# EAGLE board Layout (EAGLE 6.5.0)
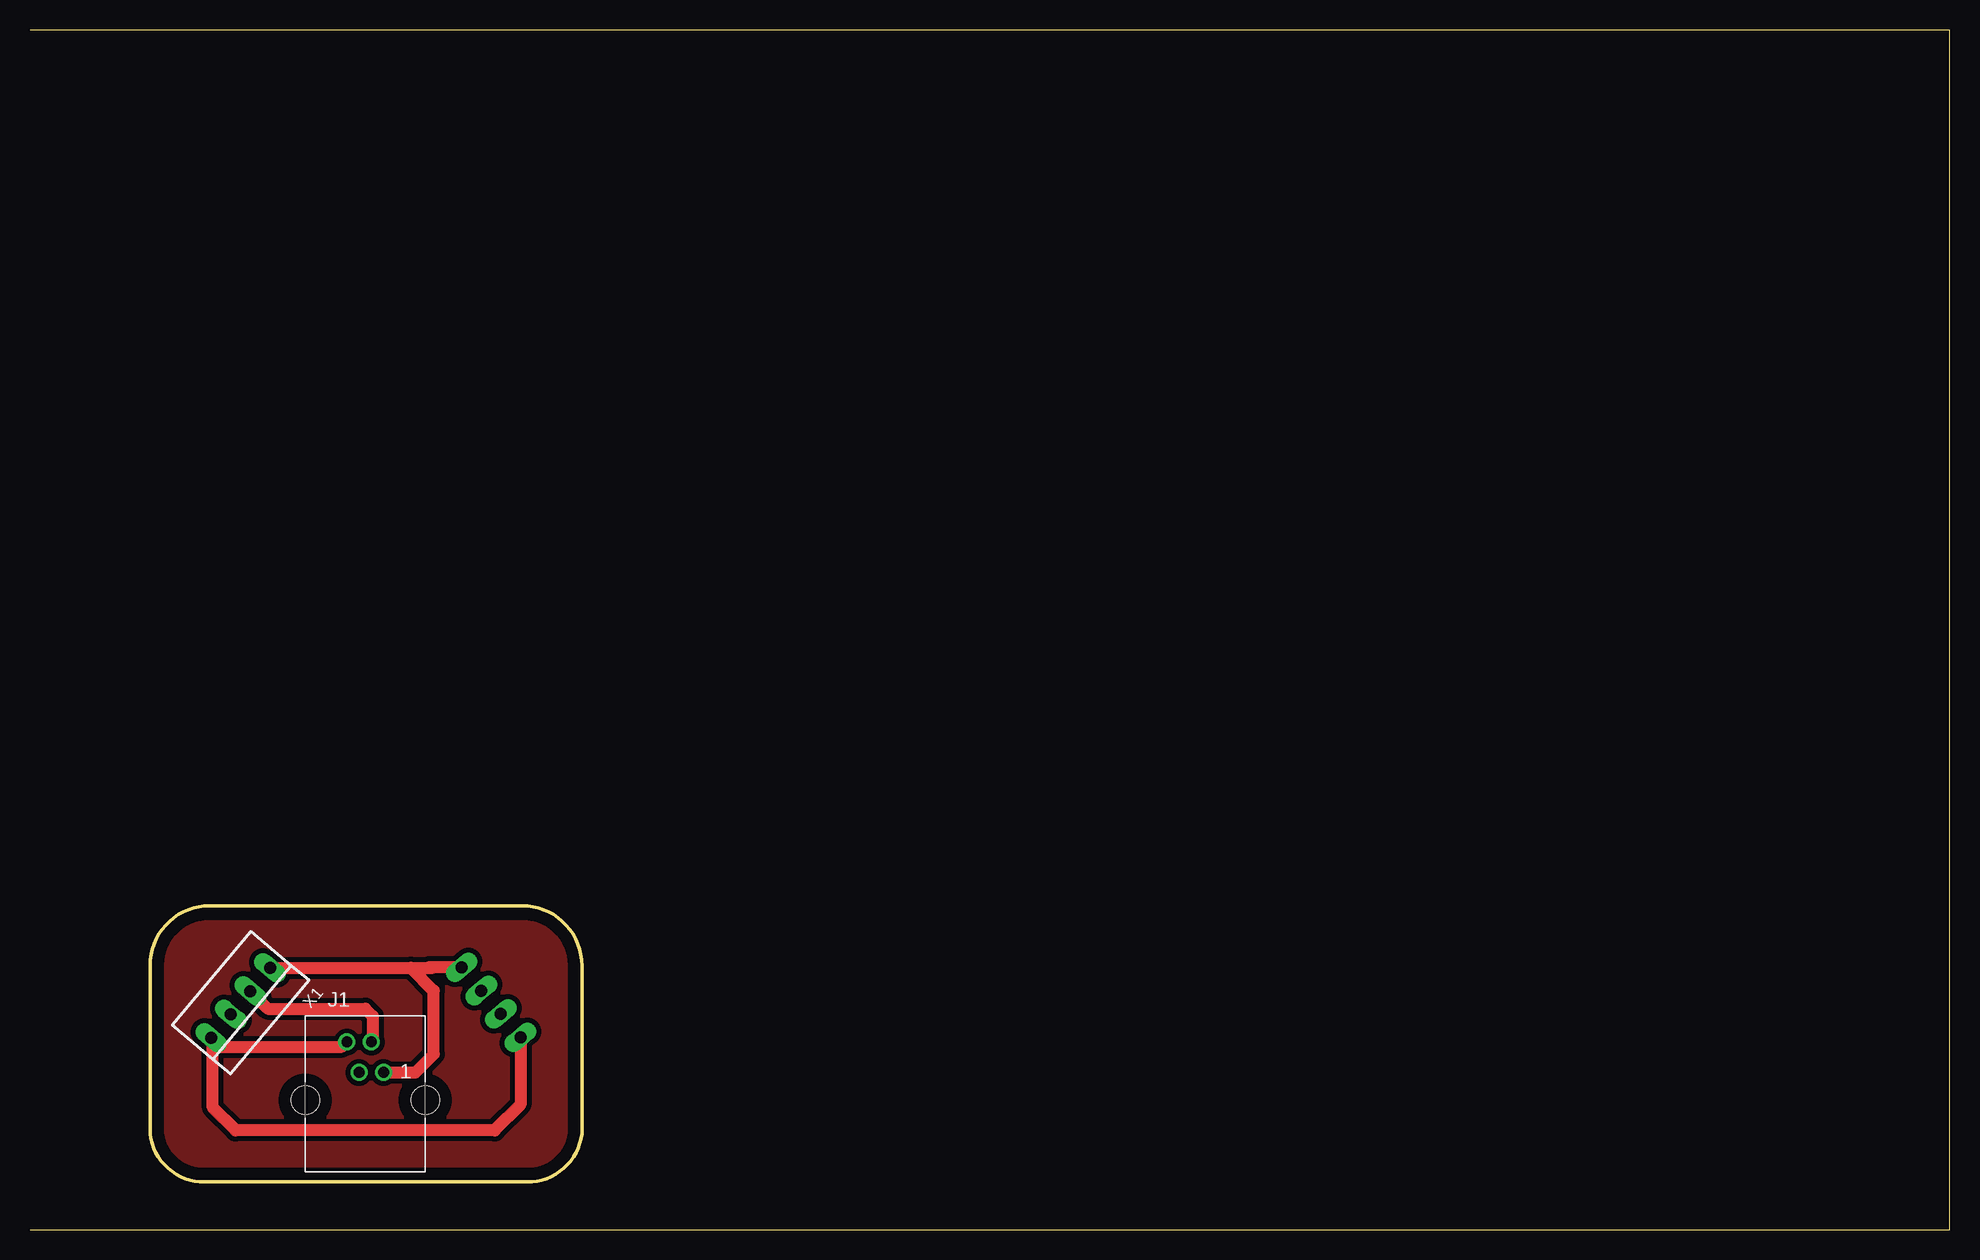
[diagram p0: board, top side]
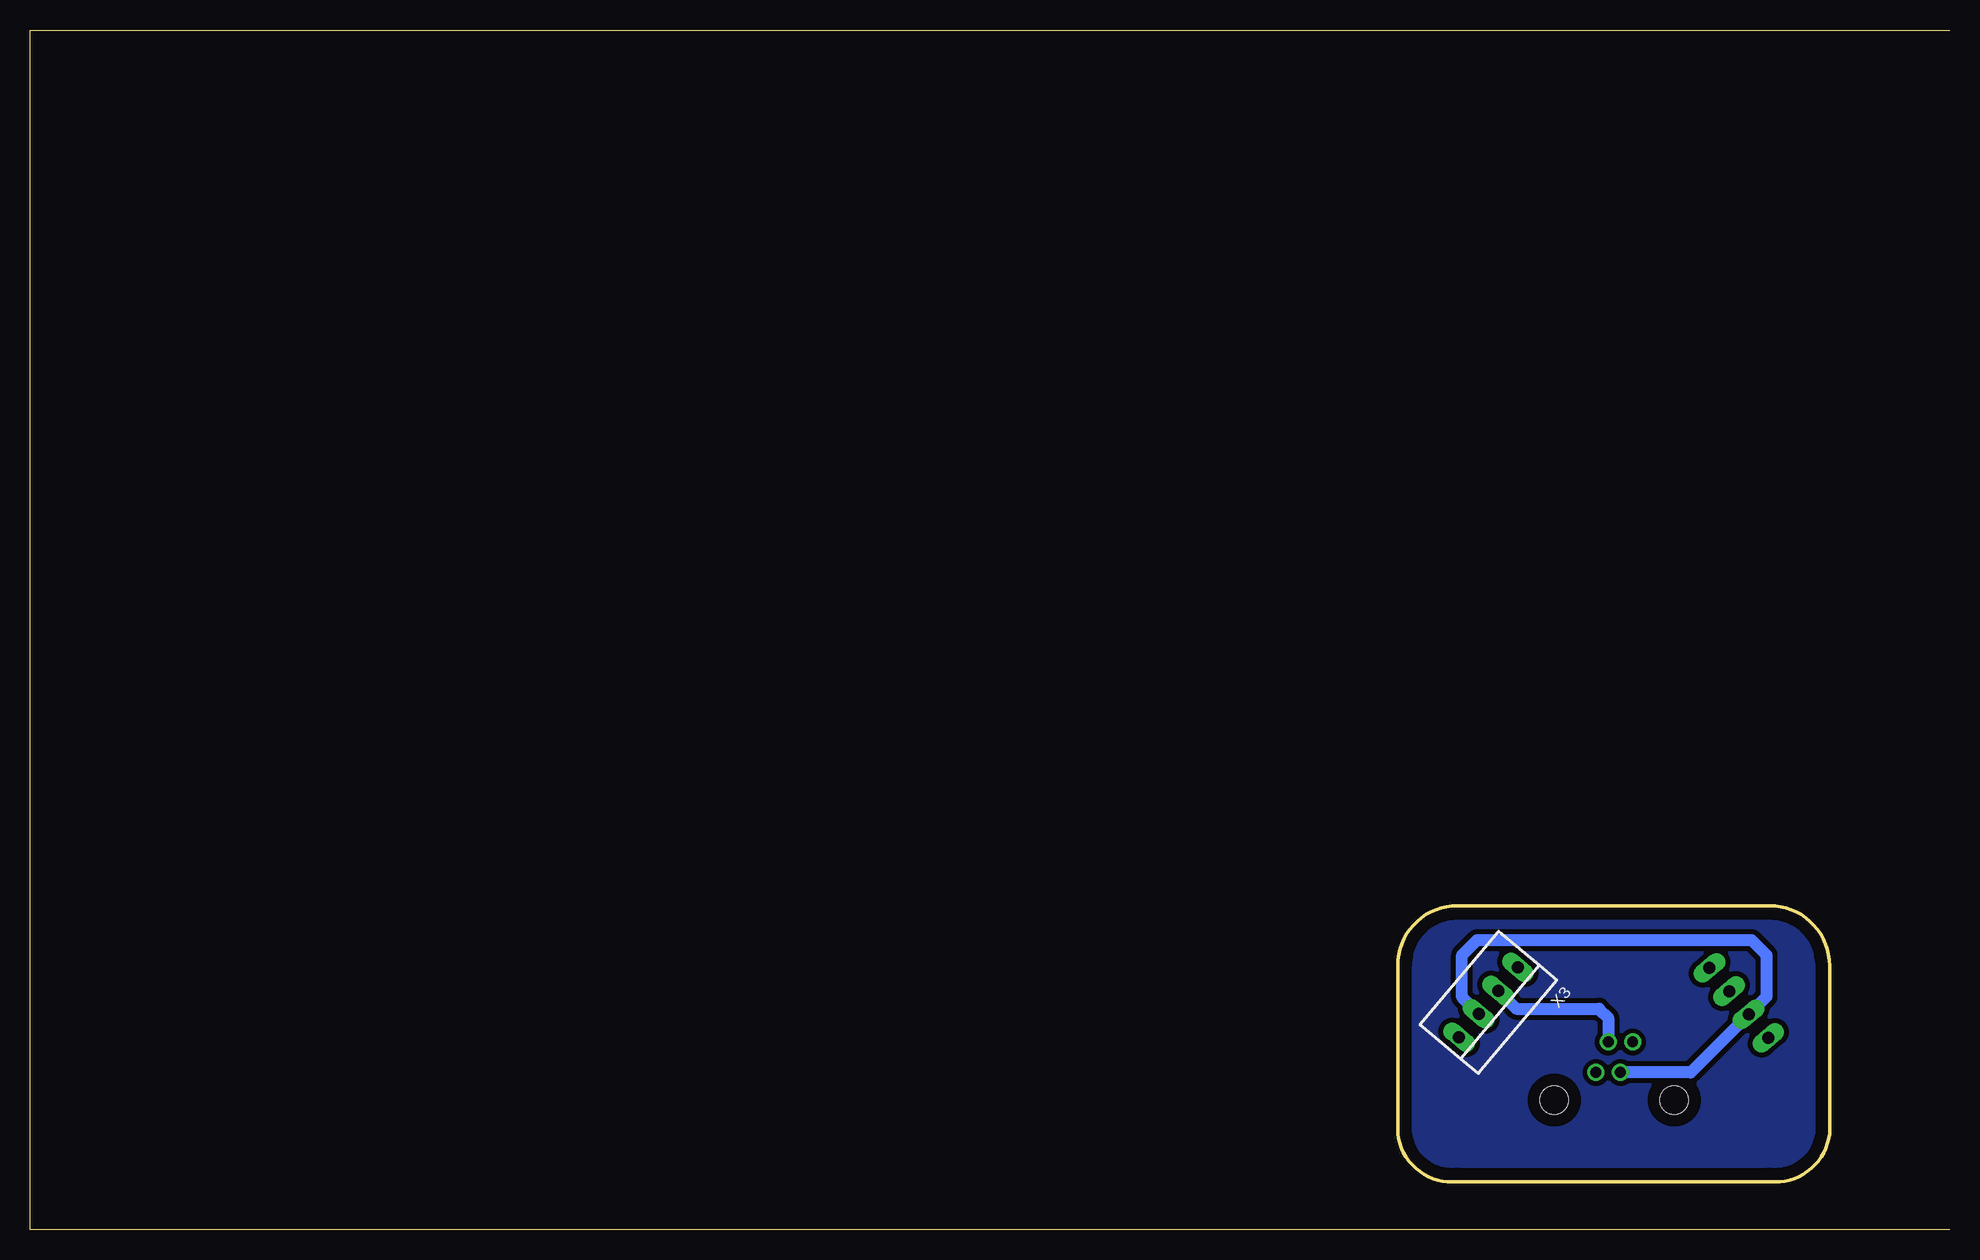
[diagram p1: board, bottom side, seen from below]

Size 160 x 100 mm. Coordinates in mm from the lower left corner, seen from the top.
Outline: 0,0 160,0 160,100 0,100
Outline: 15,27 41,27 arc-90 46,22 46,8 arc-90 41,4 15,4 arc-90 10,8 10,22 arc-90 15,27
Copper layers (1*16): Top 0.035mm / dielectric 1.5mm / Bottom 0.035mm
Design rules "default": minimum track width 10mil, minimum drill 24mil, track to track 8mil, track to pad 8mil, pad to pad 8mil, via to via 8mil, smd to smd 8mil, copper to edge 40mil, drill to drill 8mil, minimum pad ring 10mil, minimum via ring 8mil, stop-mask expansion 4mil, vias tented up to drill 0mil, thermal gap 10mil

## Footprints (pad centres in the part's own frame; a part is rotated, then mirrored left to right if it is on the bottom)
615004143821 = drill 0.9: 1 1.53,2.3; 2 0.51,4.84; 3 -0.51,2.3; 4 -1.53,4.84 | hole 2.36: -5,0; 5,0
22-23-2041 = drill 1 long: 1 -3.81,0; 2 -1.27,0; 3 1.27,0; 4 3.81,0

## Placement (x,y rotation side)
J1  [615004143821]  27.94,10.79 0 top
X1  22-23-2041  [22-23-2041]  17.55,18.9 230 top
X3  22-23-2041  [22-23-2041]  38.43,18.94 230 bottom

## Library data of the parts
J1 = InputOutputIO (rev18b)
X1 X3 = con-molex; MF: MOLEX; MPN: 22-23-2041; OC_FARNELL: 1462920; OC_NEWARK: 38C0355

## Nets
N$1: J1.1 X1.1 X3.1
N$2: J1.2 X1.2 X3.2
N$3: J1.3 X1.3 X3.3
N$4: J1.4 X1.4 X3.4

## Tracks (layer width: path | path; a pad name or v marks a point on that pad's centre or on a via)
GND
  pour Bottom (isolate 0.406): 41,4 15,4 arc-90 10,8 10,22 arc-90 15,27 41,27 arc-90 46,22 46,8 arc-90
  pour Top (isolate 0.406): 41,4 15,4 arc-90 10,8 10,22 arc-90 15,27 41,27 arc-90 46,22 46,8 arc-90
N$1
  Top 1.016: X3.1 33.66,21.86 | 33.66,21.86 33.29,21.86 | X1.1 31.75,21.82 | 31.75,21.82 33.62,21.82 33.66,21.86 | J1.1 32.15,13.1 33.66,14.61 33.66,19.91 31.75,21.82
N$2
  Top 1.016: X1.2 19.83,18.41 27.94,18.41 28.57,17.78 28.57,15.76 J1.2
  Bottom 1.016: X3.2 36.12,18.41 29.21,18.41 28.45,17.66 J1.2
N$3
  Bottom 1.016: J1.3 21.57,13.1 X1.3 15.24,19.43 15.24,22.86 16.51,24.13 39.37,24.13 40.64,22.86 40.64,19.36 X3.3
N$4
  Top 1.016: J1.4 26.02,15.24 15.85,15.24 X1.4 15.24,15.85 15.24,10.16 17.14,8.26 38.73,8.26 40.88,10.4 X3.4